# Altium PCB MAIN_PCB.PcbDoc
Units mm, origin at the board's own origin, x right, y up, seen from the top; angles counter-clockwise.
Board outline 35.2 x 19.4 mm, 2 copper layers (Top Layer, Bottom Layer); 26 components, 22 nets, 102 pads, 26 vias.
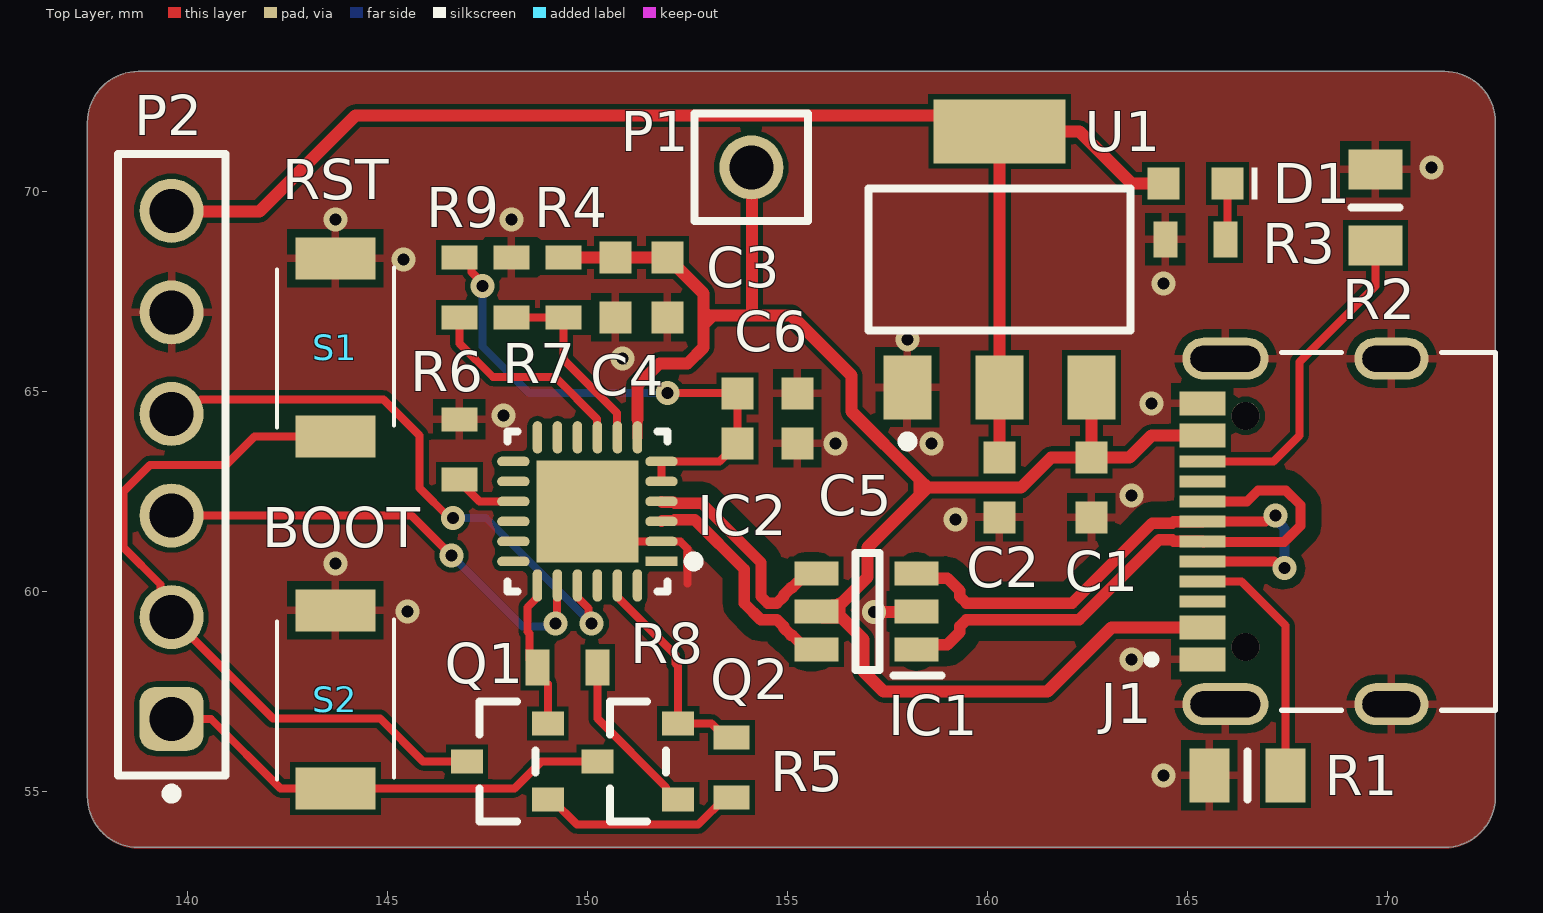
[diagram p0: Top Layer view]
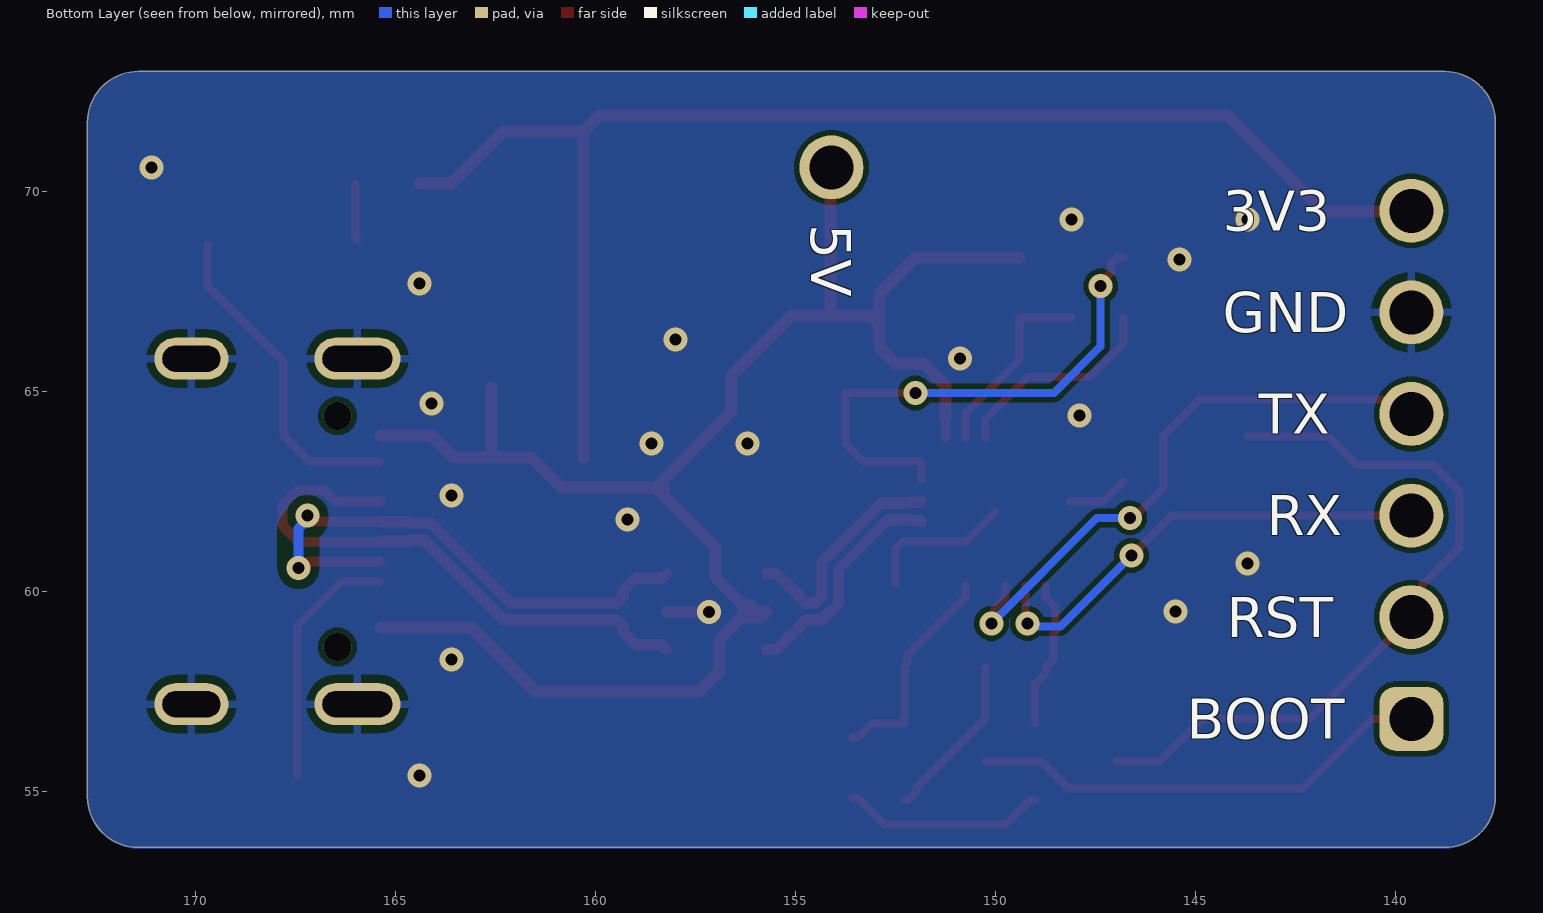
[diagram p1: Bottom Layer view, seen from below]
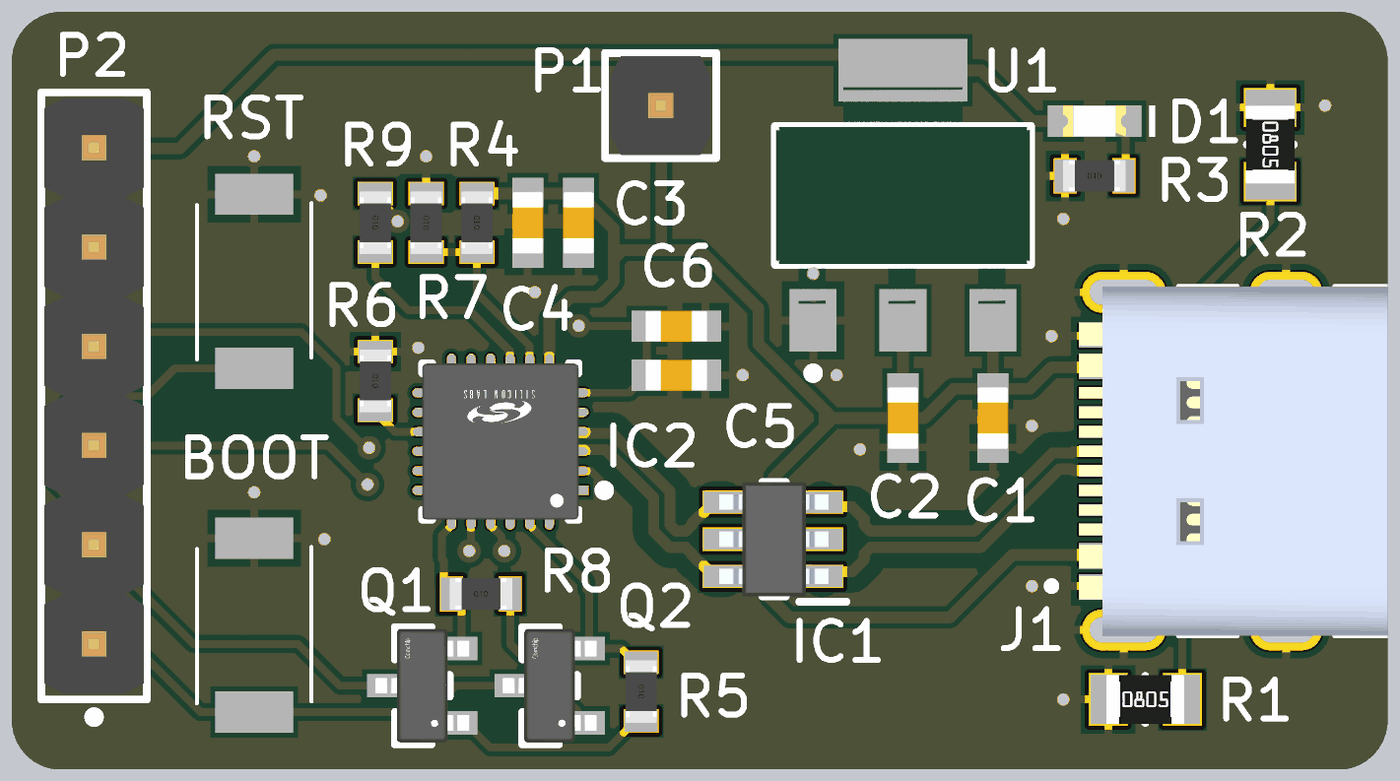
[diagram p2: 3D render of the assembled board from above, using the file's embedded part models]

## Layer stack, top to bottom
Top Solder: solder mask 0.0102, Solder Resist, Dk 3.5
Top Layer: signal copper 0.0356
Dielectric 1: dielectric 0.32, FR-4, Dk 4.8
Bottom Layer: signal copper 0.0356
Bottom Solder: solder mask 0.0102, Solder Resist, Dk 3.5

## Board outline
137.5,54.87 137.5,71.73 cw(c138.77,71.73) 138.77,73 171.43,73 cw(c171.43,71.73) 172.7,71.73 172.7,54.87 cw(c171.43,54.87) 171.43,53.6 138.77,53.6 cw(c138.77,54.87)

## Design rules (kind name [scope] priority, off if disabled: settings)
Clearance ClearanceDiffPair_GND [InNetClass('USB') vs InNet('GND')] p1: gap=0.127 ignorepadtopadclearanceinfootprint=TRUE except(0.39: Track-Poly)
Clearance [All] p2: gap=0.127 ignorepadtopadclearanceinfootprint=TRUE
Clearance ClearanceDiffPair [InNet('D_I_N') vs InNet('D_I_P')] p3: gap=0.127 ignorepadtopadclearanceinfootprint=TRUE
DiffPairsRouting DiffPairsRoutingUsb [InDifferentialPair('D_I')] p1: maxlimit=0.13 minlimit=0.13 mostfreqgap=0.13 toplayer_minwidth=0.284 toplayer_maxwidth=0.284 toplayer_prefwidth=0.284 bottomlayer_minwidth=0.284 bottomlayer_maxwidth=0.284 bottomlayer_prefwidth=0.284 impedanceprofiledriven=TRUE impedanceprofileid={46844534-D274-4BFF-9A49-FE32AA0E5E02} impedanceprofilevalue=90.000000 maxuncoupledlength=12.7
DiffPairsRouting DiffPairsRoutingUsb_1 [InDifferentialPair('D_O')] p2: maxlimit=0.13 minlimit=0.13 mostfreqgap=0.13 toplayer_minwidth=0.284 toplayer_maxwidth=0.284 toplayer_prefwidth=0.284 bottomlayer_minwidth=0.284 bottomlayer_maxwidth=0.284 bottomlayer_prefwidth=0.284 impedanceprofiledriven=TRUE impedanceprofileid={46844534-D274-4BFF-9A49-FE32AA0E5E02} impedanceprofilevalue=90.000000 maxuncoupledlength=12.7
MinimumSolderMaskSliver [All] p1: minsoldermaskwidth=0.1
PlaneConnect PlaneConnect_1 [All] p1: pad.planeconnectstyle=Relief pad.reliefexpansion=0.508 pad.reliefentries=4 pad.reliefconductorwidth=0.254 pad.reliefairgap=0.254 via.planeconnectstyle=Direct via.reliefexpansion=0.508 via.reliefentries=4 via.reliefconductorwidth=0.254 via.reliefairgap=0.254
PlaneConnect PlaneConnectVia [IsVia] p2: planeconnectstyle=Direct reliefexpansion=0.508 reliefentries=4 reliefconductorwidth=0.254 reliefairgap=0.254
PolygonConnect [All] p1: thpad.connectstyle=Relief thpad.reliefconductorwidth=0.2 thpad.reliefentries=4 thpad.polygonreliefangle="90 Angle" thpad.airgapwidth=0.2 smdpad.connectstyle=Relief smdpad.reliefconductorwidth=0.2 smdpad.reliefentries=4 smdpad.polygonreliefangle="90 Angle" smdpad.airgapwidth=0.2 via.connectstyle=Direct via.reliefconductorwidth=0.254 via.reliefentries=4 via.polygonreliefangle="90 Angle" via.airgapwidth=0.254
RoutingVias [All] p1: holewidth=0.3 width=0.6 viastyle="Through Hole" minholewidth=0.2 minwidth=0.5 maxholewidth=0.711 maxwidth=1.27
SilkToSilkClearance [All] p1: silktosilkclearance=0.2
SilkToSolderMaskClearance [IsPad] p1: minsilkscreentomaskgap=0.2 clearancetoexposedcopper=TRUE
SolderMaskExpansion [IsVia] p1: expansion=0.102 istentingtop=TRUE
SupplyNets "Schematic Supply Nets_3" [InNet('+3V3')] p1: voltage=0.000
SupplyNets "Schematic Supply Nets_2" [InNet('GND')] p2: voltage=0.000
SupplyNets "Schematic Supply Nets_1" [InNet('+3V3_CP2102')] p3: voltage=0.000
SupplyNets "Schematic Supply Nets" [InNet('+VBUS')] p4: voltage=0.000
Width [All] p1: maxlimit=1 minlimit=0.127 preferedwidth=0.2
25 further rules are at their usual default settings.

## Classes and differential pairs
net class USB: D_I_N D_I_P D_O_N D_O_P
differential pair class USB_OUT: D_O
differential pair class USB_IN: D_I
differential pair D_O: +D_O_P -D_O_N
differential pair D_I: +D_I_P -D_I_N

## Components (designator, comment, footprint, x,y, rotation, side; value= is the part's Value field where it differs from the comment)
C1 "Generic Capacitor 10uF 0603" "Wurth 0603 capacitor" 162.6,62.6 r90 top value=10uF
C2 "Generic Capacitor 10uF 0603" "Wurth 0603 capacitor" 160.3,62.6 r90 top value=10uF
C3 "Generic Capacitor 100nF 0603" "Wurth 0603 capacitor" 152,67.6 r90 top value=100nF
C4 "Generic Capacitor 4.7uF 0603" "Wurth 0603 capacitor" 150.7,67.6 r90 top value=4.7uF
C5 "Generic Capacitor 100nF 0603" "Wurth 0603 capacitor" 154.5,63.7 r180 top value=100nF
C6 "Generic Capacitor 4.7uF 0603" "Wurth 0603 capacitor" 154.5,64.95 r180 top value=4.7uF
D1 "150060RS75000" WL-SMCW_0603_150060xx75000 165.2,70.2 r180 top
IC1 "USBLC6-2SC6" "Tech Public SOT23-6" 157,59.5 r180 top
IC2 "CP2102N-A02-GQFN24R" FP-CP2102N-A02-GQFN24R-IPC_C 150,62 r180 top
J1 "KH-TYPE-C-16P" KINGHELM_KH-TYPE-C-16P 170.1,61.5 r90 top
P1 "61300111121" "1x1 2.54mm M" 154.1,70.6 r180 top
P2 "61300611121" "6x1 2.54mm M" 139.603,63.167 r90 top
Q1 "SS8050-G" FP-SS8050-G-MFG 148,55.75 r180 top
Q2 "SS8050-G" FP-SS8050-G-MFG 151.26,55.75 r180 top
R1 "Generic Resistor 5k1 0805" "0805 Resistor" 166.5,55.4 r0 top value=5k1
R2 "Generic Resistor 5k1 0805" "0805 Resistor" 169.7,69.6 r270 top value=5k1
R3 "Generic Resistor 100R 0603" "Wurth 0603 Resistor" 165.2,68.8 r0 top value=100R
R4 "Generic Resistor 22k1 0603" "Wurth 0603 Resistor" 149.4,67.6 r90 top value=22.1k
R5 "Generic Resistor 10k 0603" "Wurth 0603 Resistor" 153.6,55.6 r270 top value=10k
R6 "Generic Resistor 10k 0603" "Wurth 0603 Resistor" 146.8,63.55 r90 top value=10k
R7 "Generic Resistor 47k5 0603" "Wurth 0603 Resistor" 148.1,67.6 r270 top value=47.5k
R8 "Generic Resistor 10k 0603" "Wurth 0603 Resistor" 149.5,58.1 r0 top value=10k
R9 "Generic Resistor 10k 0603" "Wurth 0603 Resistor" 146.8,67.6 r270 top value=10k
S1 "TS-1088R-02026" TS1088R02026 143.7,66.1 r90 top
S2 "TS-1088R-02026" TS1088R02026 143.7,57.3 r90 top
U1 "AP1117E33G-13" FP-SOT223-MFG 160.3,68.3 r90 top

## Footprints (in the part's own frame and the unit in brackets; to place one, negate y for a bottom-side part, rotate by r counter-clockwise, add the part's x,y. Pads: shape width x height; smd on the part's side, far side on the other; paste and mask are expansions set on the pad)
"1x1 2.54mm M" [mm] "Pin Header, pitch 2.54 mm, THT, Vertical, single row, 1p"
  round 1.6 hole 1.1: 1(0,0)
  silkscreen extent -1.42,-1.35 1.42,1.35, body extent -1.27,-1.27 1.27,1.27, height 8.57
"6x1 2.54mm M" [mm] "Pin Header, pitch 2.54 mm, THT, Vertical, single row, 6p"
  rrect50% 1.6x1.6 hole 1.1: 1(-6.35,0)
  round 1.6 hole 1.1: 2(-3.81,0) 3(-1.27,0) 4(1.27,0) 5(3.81,0) 6(6.35,0)
  silkscreen extent -8.34,-1.35 7.77,1.35, body extent -7.62,-1.27 7.62,1.27, height 8.57
"0805 Resistor" [mm]
  rect 1x1.35 smd paste-0.045 mask+0.1: 1(-0.95,0) 2(0.95,0)
  silkscreen extent 0,-0.6 0,0.6, body extent -1,-0.63 1,0.63, height 0.52
FP-CP2102N-A02-GQFN24R-IPC_C [mm]
  rect 0.81x0.239 smd paste-0.014 mask+0.05: 1(-1.851,1.25)
  rrect100% 0.81x0.239 smd paste-0.015 mask+0.05: 2(-1.851,0.75) 3(-1.851,0.25) 4(-1.851,-0.25) 5(-1.851,-0.75) 6(-1.851,-1.25) 13(1.851,-1.25) 14(1.851,-0.75) 15(1.851,-0.25) 16(1.851,0.25) 17(1.851,0.75) 18(1.851,1.25)
  rrect100% 0.239x0.81 smd paste-0.015 mask+0.05: 7(-1.25,-1.851) 8(-0.75,-1.851) 9(-0.25,-1.851) 10(0.25,-1.851) 11(0.75,-1.851) 12(1.25,-1.851) 19(1.25,1.851) 20(0.75,1.851) 21(0.25,1.851) 22(-0.25,1.851) 23(-0.75,1.851) 24(-1.25,1.851)
  rect 2.55x2.55 smd paste-0.1 mask+0.05: 25(0,0)
  silkscreen extent -2.78,-2 2,2, body extent -2.36,-2.36 2.36,2.36, height 0.25
FP-SOT223-MFG [mm]
  rect 1.6x1.2 smd paste+0 mask+0: 1(-3.2,2.3) 2(-3.2,0) 3(-3.2,-2.3)
  rect 1.6x3.3 smd paste+0 mask+0: 4(3.2,0)
  silkscreen extent -4.67,-3.27 1.78,3.27, body extent -4.1,-3.37 4.1,3.37, height 0.25
FP-SS8050-G-MFG [mm]
  rect 0.8x0.6 smd paste+0 mask+0: 1(-1.01,0.95) 2(-1.01,-0.95) 3(1.01,0)
  silkscreen extent -0.7,-1.5 0.7,1.5, body extent -1.51,-1.6 1.51,1.6, height 0.25
KINGHELM_KH-TYPE-C-16P [mm]
  rect 0.6x1.15 smd mask+0.05: A1_B12(-3.2,4.725) A4_B9(-2.4,4.725) A9_B4(2.4,4.725) A12_B1(3.2,4.725)
  rect 0.3x1.15 smd mask+0.05: A5(-1.25,4.725) A6(-0.25,4.725) A7(0.25,4.725) A8(1.25,4.725) B5(1.75,4.725) B6(0.75,4.725) B7(-0.75,4.725) B8(-1.75,4.725)
  oval 1.05x1.85 hole 0.65 slot 1.45 at 90 deg mask+0.05: SH1(-4.32,0) SH2(4.32,0)
  oval 1.05x2.15 hole 0.65 slot 1.75 at 90 deg mask+0.05: SH3(-4.32,4.15) SH4(4.32,4.15)
  round 0.7 hole 0.7 unplated: ""(-2.89,3.65) ""(2.89,3.65)
  silkscreen extent -4.47,-2.6 4.47,6.1, body extent -4.47,-2.6 4.47,5.3, height 3.22
"Tech Public SOT23-6" [mm]
  rect 1.1x0.6 smd paste-0.03 mask+0.1: 1(-1.225,0.95) 2(-1.225,0) 3(-1.225,-0.95) 4(1.275,-0.95) 5(1.275,0) 6(1.275,0.95)
  silkscreen extent -1.85,-1.46 0.3,1.6, body extent -1.4,-1.46 1.4,1.46, height 1.45
TS1088R02026 [mm]
  rect 1.05x2 smd: 1(-2.225,0) 2(2.225,0)
  silkscreen extent -2,-1.47 2,1.47
WL-SMCW_0603_150060xx75000 [mm] "SMD Mono-color Chip LED, body 1.6x0.8mm"
  rect 0.8x0.8 smd: 1(-0.8,0) 2(0.8,0)
  silkscreen extent -1.55,-0.4 -1.4,0.4, body extent -0.8,-0.4 0.8,0.4, height 0.7
"Wurth 0603 capacitor" [mm] "Ceramic Capacitors, body 1.6x0.8mm"
  rect 0.8x0.8 smd: 1(-0.75,0) 2(0.75,0)
  body extent -0.8,-0.4 0.8,0.4, height 0.8
"Wurth 0603 Resistor" [mm] "Fixed Thick Film, body 1.60 x 0.80 mm"
  rect 0.6x0.9 smd paste-0.028 mask+0.1: 1(-0.75,0) 2(0.75,0)
  body extent -0.8,-0.4 0.8,0.4, height 0.45

## Part data
D1: library part CMP-1426-00001-3, Case Code (Imperial)=0603, Case Code (Metric)=1608, Color=Red, Forward Current=100mA, Forward Voltage=2V, Max Junction Temperature (Tj)=95°C, Max Operating Temperature=85°C, Max Reverse Voltage (DC)=5V, Min Operating Temperature=-40°C, Power Dissipation=72mW, Test Current=20mA, Case/Package=0603, Dominant Wavelength=625nm, Height=700µm, Length=1.6mm, Lens Style="Clear, Rectangular", Luminous Intensity=250mcd, Mount="Surface Mount", NexarPartId=29717776, Packaging="Tape and Reel", Peak Wavelength=630nm, REACH SVHC=Unknown, Reverse Voltage=5V, RoHS=Compliant, Viewing Angle=140°, Wavelength=625nm, Width=800µm
IC1: library part "Tech Public USBLC6-2SC6", "Integrated Circuit", Manufacturer_Name="Tech Public", Mouser Part Number=511-USBLC6-2SC6, Arrow Part Number=USBLC6-2SC6, Arrow Price/Stock=https://www.arrow.com/en/products/usblc6-2sc6/stmicroelectronics?region=nac, Height=1.45mm, Manufacturer_Part_Number=USBLC6-2SC6
IC2: library part "Silicon Labs CP2102N-A02-GQFN24R", "IC USB TO UART BRIDGE QFN24", Ambient Temperature Range High=85°C, Manufacturer Lifecycle Status="FULL PRODUCTION", Max Junction Temperature (Tj)=105°C, Max Supply Voltage=3.6V, Min Operating Temperature=-40°C, Min Supply Voltage=1.71V, Supplier Part Number 1=336-5888-1-ND, Height=800µm, Interface="I2C, RS-485, UART, USB", Lifecycle Status=Production, Max Operating Temperature=85°C, NexarPartId=99772192, Number of Digital IO=4, Schedule B="8542390000, 8542390000|8542390000|8542390000|8542390000|8542390000", Supplier 1=Digikey, Supplier 2=Digikey, Supplier 3=Digikey, Supplier 4="Arrow Electronics", Supplier 5=Farnell, Supplier 6=Farnell, Supplier 7=Mouser, Supplier 8=Newark, Supplier Part Number 2=336-5888-6-ND, Supplier Part Number 3=336-5888-2-ND, Supplier Part Number 4=CP2102N-A02-GQFN24R, Supplier Part Number 5=3387002, Supplier Part Number 6=3387002RL, Supplier Part Number 7=634-CP2102NA02QFN24R, Supplier Part Number 8=66AH5403
J1: Package=None, Availability="Not in stock", Check_prices=https://www.snapeda.com/parts/KH-TYPE-C-16P/Ki/view-part/?ref=eda, MF=kinghelm, MP=KH-TYPE-C-16P, Price=None, SnapEDA_Link=https://www.snapeda.com/parts/KH-TYPE-C-16P/Ki/view-part/?ref=snap
P1: library part 1P, "WR-PHD Pin Header, THT, Vertical, pitch 2.54mm, 1 Row, 1P", Contact Resistance=20mOhm, Manufacturer="Wurth Elektronik", Operating Temperature Max=105°C, Operating Temperature Min=-40°C, Rated Current=3A, Withstanding Voltage=500V, Working Voltage=250V, Category="Board-to-Board Connectors", ComponentLink1Description="Website Link", ComponentLink1URL=https://www.we-online.com/redexpert/article/61300111121?ad, ComponentLink2Description="Datasheet Link", ComponentLink2URL=https://www.we-online.com/redexpert/spec/61300111121?ad, Gender="Pin Header", Manufacturer Part Number=61300111121, Match Code=WR-PHD, Mount="Through Hole", Number of Pins=1, Number of Rows=1, Orientation=Vertical, Packaging=Bag, Pitch=2.54mm
P2: library part 6P, "WR-PHD Pin Header, THT, Vertical, pitch 2.54mm, 1 Row, 6P", Contact Resistance=20mOhm, Manufacturer="Wurth Elektronik", Operating Temperature Max=105°C, Operating Temperature Min=-40°C, Rated Current=3A, Withstanding Voltage=500V, Working Voltage=250V, Category="Board-to-Board Connectors", ComponentLink1Description="Website Link", ComponentLink1URL=https://www.we-online.com/redexpert/article/61300611121?ad, ComponentLink2Description="Datasheet Link", ComponentLink2URL=https://www.we-online.com/redexpert/spec/61300611121?ad, Gender="Pin Header", Manufacturer Part Number=61300611121, Match Code=WR-PHD, Mount="Through Hole", Number of Pins=6, Number of Rows=1, Orientation=Vertical, Packaging=Bag, Pitch=2.54mm
Q1 Q2: library part CMP-20235-000001-1, "NPN TRANSISTOR 1.5A 40V SOT-23 R", Case/Package=TO-236-3, Collector Emitter Breakdown Voltage=25V, Collector Emitter Voltage (VCEO)=400mV, Max Collector Current=1.5A, Max Power Dissipation=300mW, Transition Frequency=100MHz, Max Breakdown Voltage=25V, Mount="Surface Mount", Packaging="Tape and Reel", RoHS Compliant=Yes
S1 S2: library part "XUNPU TS-1088R-02026"
U1: library part CMP-12756-000021-1, "IC REG LINEAR 3.3V 1A SOT223-3", Dropout Voltage=1.3V, Manufacturer=Diodes, Max Junction Temp=+125°C, Max Supply Voltage=18V, Min Supply Voltage=6.4V, Nominal Supply Current=5mA, Output Current=1A, Output Voltage=3.3V, Package=SOT223, Temperature="-20°C to +125°C", Temperature Range Low=-20°C, Automotive=No, Category=IC, ComponentLink2Description=Datasheet, ComponentLink2URL=https://www.diodes.com/assets/Datasheets/AP1117.pdf, Device Class L1="Integrated Circuits (ICs)", Device Class L2="Power Management ICs", Device Class L3="Voltage Regulators - Linear", Digikey Description="IC REG LINEAR 3.3V 1A SOT223-3", Footprint Url=https://www.diodes.com/assets/Package-Files/SOT223.pdf, Height=1.8mm, Ipc Land Pattern Name=SOT230P700X180-4, Lead Free=Yes, Manufacturer Part Number=AP1117E33G-13, Mouser Description="LDO Voltage Regulators LDO BI 1.0A 1.3V 12V 5.0V 3.3V FIX", Number of Outputs=1, Obsolete Part=true, Octopart=https://octopart.com/ap1117e33g-13-diodes+inc.-669494, Output Type=Fixed, RoHS=TRUE, Standoff Height=0.01mm, Temperature Range High=+125°C

## Via types
v1: diameter 0.6, hole 0.3, Top Layer to Bottom Layer, tented both sides, 26 vias

## Nets (pads, with @x,y where several pads share a name; then routed paths per layer and width w, separated by ;. In a path a pad name is that pad's centre, name@x,y a point inside that pad or via, vN(x,y) a via of type N, cw(c..) or ccw(c..) an arc to the next point about the centre after c; other vN are vias at no path point)
+3V3: C2.2 D1.2 P2.6 U1.2 U1.4 | length 34.7
  Top Layer w0.3: P2.6 139.62,69.5 141.8,69.5 144.2,71.9 159.9,71.9 U1.4 ; C2.2 U1.2 U1.4 ; D1.2 163.6,70.2 162.3,71.5 U1.4
+3V3_CP2102: C5.2 C6.2 IC2.5 IC2.6 R9.1 | length 13.2
  Top Layer w0.2: R9.1 146.95,68.35 147.1,68.2 147.1,67.987 147.371,67.716 v1(147.371,67.635) ; IC2.5@151.851,62.783 IC2.6 153.3,63.25 C5.2 C6.2 153.745,64.955 152.008,64.955 v1(152.003,64.961)
  Bottom Layer w0.2: v1(147.371,67.635) 147.371,66.129 148.539,64.961 v1(152.003,64.961)
+VBUS: C1.2 C3.2 C4.2 IC1.5 IC2.7 J1.A4_B9 J1.A9_B4 P1.1 R4.2 U1.3 | length 46.5
  Top Layer w0.25: 151.249,64.3 151.249,63.853 IC2.7
  Top Layer w0.3: R4.2 C3.2 152.9,67.45 152.9,67 ; 151.249,64.3 151.249,65.149 151.804,65.704 152.504,65.704 152.9,66.1 152.9,67 ; 152.942,66.706 153.136,66.9 ; P1.1@154.118,70.582 154.118,66.9 ; IC1.5@156.269,59.356 156.301,59.389 156.301,59.7 ; 158.295,62.461 158.295,62.805 ; U1.3 C1.2 ; J1.A4_B9 163.1,59.1 161.5,57.5 157.4,57.5 156.9,58 156.9,58.8 156.35,59.35 155.875,59.35 IC1.5 156,59.5 156,59.525 156.125,59.65 156.251,59.65 156.301,59.7 ; J1.A9_B4 164.1,63.9 163.55,63.35 C1.2 ; 152.9,67 153,66.9 153.136,66.9 ; 153.136,66.9 154.118,66.9 ; 154.118,66.9 155.1,66.9 156.6,65.4 156.6,64.5 158.295,62.805 ; 156.301,59.7 156.345,59.7 157,60.355 157,61.1 158.5,62.6 ; 158.295,62.805 158.5,62.6 ; 158.5,62.6 160.845,62.6 161.595,63.35 C1.2
BOOT: P2.1 Q2.3 S2.1 | length 11.7
  Top Layer w0.2: P2.1@139.6,56.82 P2.1 140.583,56.817 142.325,55.075 S2.1 148.175,55.075 148.85,55.75 Q2.3
D_I_N: IC1.3 J1.A7 J1.B7 | length 13.8
  Top Layer w0.25: J1.A7@165.35,61.725 165.367,61.742 J1.A7 166.955,61.75 167.105,61.9 v1(167.2,61.9) ; J1.B7 167.163,60.75 167.331,60.582 v1(167.426,60.582)
  Top Layer w0.284: IC1.3 158.343,60.332 158.995,60.332 159.307,60.02 159.307,59.874 159.474,59.707 162.121,59.707 164.121,61.707 164.623,61.707 164.658,61.742 J1.A7@165.367,61.742
  Bottom Layer w0.25: v1(167.2,61.9) 167.2,61.805 167.426,61.58 v1(167.426,60.582)
D_I_P: IC1.1 J1.A6 J1.B6 | length 14.3
  Top Layer w0.25: J1.A6@165.35,61.275 165.367,61.258 J1.A6 165.4,61.225 165.412,61.237 167.421,61.237 167.825,61.641 167.825,62.159 167.459,62.525 166.767,62.525 166.492,62.25 J1.B6
  Top Layer w0.284: IC1.1 158.343,58.668 158.995,58.668 159.307,58.98 159.307,59.126 159.474,59.293 162.293,59.293 164.293,61.293 164.623,61.293 164.658,61.258 J1.A6@165.367,61.258
D_O_N: IC1.4 IC2.4 | length 5.8
  Top Layer w0.284: IC2.4 151.874,62.228 152.159,62.228 152.179,62.207 152.854,62.207 154.337,60.724 154.337,59.874 154.504,59.707 154.739,59.707 154.906,59.874 154.906,59.911 155.086,60.091 155.116,60.091 155.475,60.45 IC1.4
D_O_P: IC1.6 IC2.3 | length 5.8
  Top Layer w0.284: IC2.3 151.874,61.772 152.159,61.772 152.179,61.793 152.682,61.793 153.923,60.552 153.923,59.702 154.332,59.293 154.739,59.293 154.906,59.126 154.906,59.089 155.086,58.909 155.116,58.909 155.475,58.55 IC1.6
DTR: IC2.23 Q2.2 R5.1 | length 5.6
  Top Layer w0.2: IC2.23 150.75,59.864 152.2,58.414 152.2,58.2 152.27,58.13 Q2.2 153.1,56.7 153.45,56.35 R5.1
GND: C1.1 C2.1 C3.1 C4.1 C5.1 C6.1 IC1.2 IC2.2 IC2.25 J1.A1_B12 J1.A12_B1 J1.SH1 J1.SH2 J1.SH3 J1.SH4 P2.5 R1.1 R2.1 R3.1 R6.2 R7.1 S1.2 S2.2 U1.1 | length 4.8
  Top Layer w0.2: IC2.25 150.75,61.25 IC2.2 151.859,61.242 152.325,61.242 152.5,61.068 152.5,60.2
  Top Layer w0.3: v1(157.163,59.481) 157.173,59.49 158.215,59.49 IC1.2
  other v1: 164.4,55.4 163.6,58.3 145.5,59.5 143.7,60.7 159.2,61.8 163.6,62.4 156.2,63.7 158.6,63.7 147.9,64.4 164.1,64.7 150.883,65.822 158,66.3 164.4,67.7 145.4,68.3 143.7,69.3 148.1,69.3 171.1,70.6
NetD1_1: D1.1 R3.2 | length 1.4
  Top Layer w0.2: R3.2 166,68.85 D1.1
NetIC2_8: IC2.8 R4.1 R7.2 | length 4.9
  Top Layer w0.2: R7.2 R4.1 149.4,65.8 150.742,64.458 150.742,63.859 IC2.8
NetIC2_9: IC2.9 R9.2 | length 5.3
  Top Layer w0.2: R9.2 146.8,66.2 147.643,65.357 149.199,65.357 150.242,64.314 150.242,63.859 IC2.9
NetIC2_15: IC2.15 R6.1 | length 1.6
  Top Layer w0.2: R6.1@146.8,62.75 147.3,62.25 IC2.15
NetJ1_A5: J1.A5 R1.2 | length 6.3
  Top Layer w0.2: J1.A5 166.35,60.25 167.45,59.15 R1.2
NetJ1_B5: J1.B5 R2.2 | length 8.2
  Top Layer w0.2: J1.B5 167.15,63.25 167.8,63.9 167.8,65.733 169.7,67.633 R2.2
NetQ1_1: Q1.1 R5.2 | length 5.1
  Top Layer w0.2: Q1.1 149.11,54.8 149.74,54.17 152.77,54.17 153.45,54.85 R5.2
NetQ2_1: Q2.1 R8.2 | length 4.2
  Top Layer w0.2: R8.2 150.25,56.82 151.97,55.1 151.97,55 152.17,54.8 Q2.1
RESET: P2.2 Q1.3 S1.1 | length 18.4
  Top Layer w0.2: S1.1 141.675,63.875 140.962,63.162 139.062,63.162 138.4,62.5 138.4,61.1 139.332,60.168 139.332,59.628 139.6,59.36 142.14,56.82 144.82,56.82 145.89,55.75 Q1.3
RTS: IC2.19 Q1.2 R8.1 | length 3.8
  Top Layer w0.2: IC2.19 148.75,59.853 148.5,59.603 148.5,59 148.55,58.95 148.55,58.3 R8.1 148.75,57.95 149.01,57.69 Q1.2
RXD: IC2.20 P2.3 | length 11.8
  Top Layer w0.2: P2.3@139.6,61.9 145.6,61.9 v1(146.6,60.9) ; v1(149.2,59.2) 149.242,59.242 149.242,60.141 IC2.20
  Bottom Layer w0.2: v1(146.6,60.9) 148.377,59.123 149.123,59.123 v1(149.2,59.2)
TXD: IC2.21 P2.4 | length 14.8
  Top Layer w0.2: P2.4@139.6,64.44 139.979,64.44 140.339,64.8 144.9,64.8 145.8,63.9 145.8,62.583 146.543,61.841 v1(146.641,61.841) ; IC2.21 149.75,59.853 150.023,59.579 150.023,59.277 v1(150.1,59.2)
  Bottom Layer w0.2: v1(146.641,61.841) 147.459,61.841 v1(150.1,59.2)
pads on no net: IC2.1 IC2.10 IC2.11 IC2.12 IC2.13 IC2.14 IC2.16 IC2.17 IC2.18 IC2.22 IC2.24 J1. J1.A8 J1.B8

## Polygon pours and split planes (outlines as drawn)
GND on Bottom Layer "GND_L02_P000" (solid, pour order 0): 137.5,71.73 137.5,54.87 ccw(c138.8,54.87) 138.8,53.57 171.4,53.57 ccw(c171.4,54.87) 172.7,54.87 172.7,71.73 ccw(c171.43,71.73) 171.43,73 138.77,73 ccw(c138.77,71.73)
GND on Top Layer "GND_L01_P001" (solid, remove dead copper, pour order 1): 137.5,71.73 137.5,54.87 ccw(c138.8,54.87) 138.8,53.57 171.4,53.57 ccw(c171.4,54.87) 172.7,54.87 172.7,71.73 ccw(c171.43,71.73) 171.43,73 138.77,73 ccw(c138.77,71.73)

## Silkscreen, mask and mechanical layers (free items; w line width, h text height)
Top Overlay:
  text "RST" at 142.367,69.8 h1
  text "BOOT" at 141.867,61.1 h1
Bottom Overlay:
  text "5V" at 154.6,69.18 h1 r90
  text "3V3" at 144.316,69.017 h1
  text "GND" at 144.316,66.48 h1
  text "TX" at 143.416,63.94 h1
  text "RX" at 143.216,61.4 h1
  text "RST" at 144.216,58.86 h1
  text "BOOT" at 145.215,56.32 h1
Mechanical 1:
  the board outline again, w0.1

## Text inside footprints (layer, text, board x,y; h text height)
J1: Top 3D Body "PCB EDGE" at 172.35,67 h0.81 r90